# EAGLE board hat v1 (EAGLE 9.6.1)
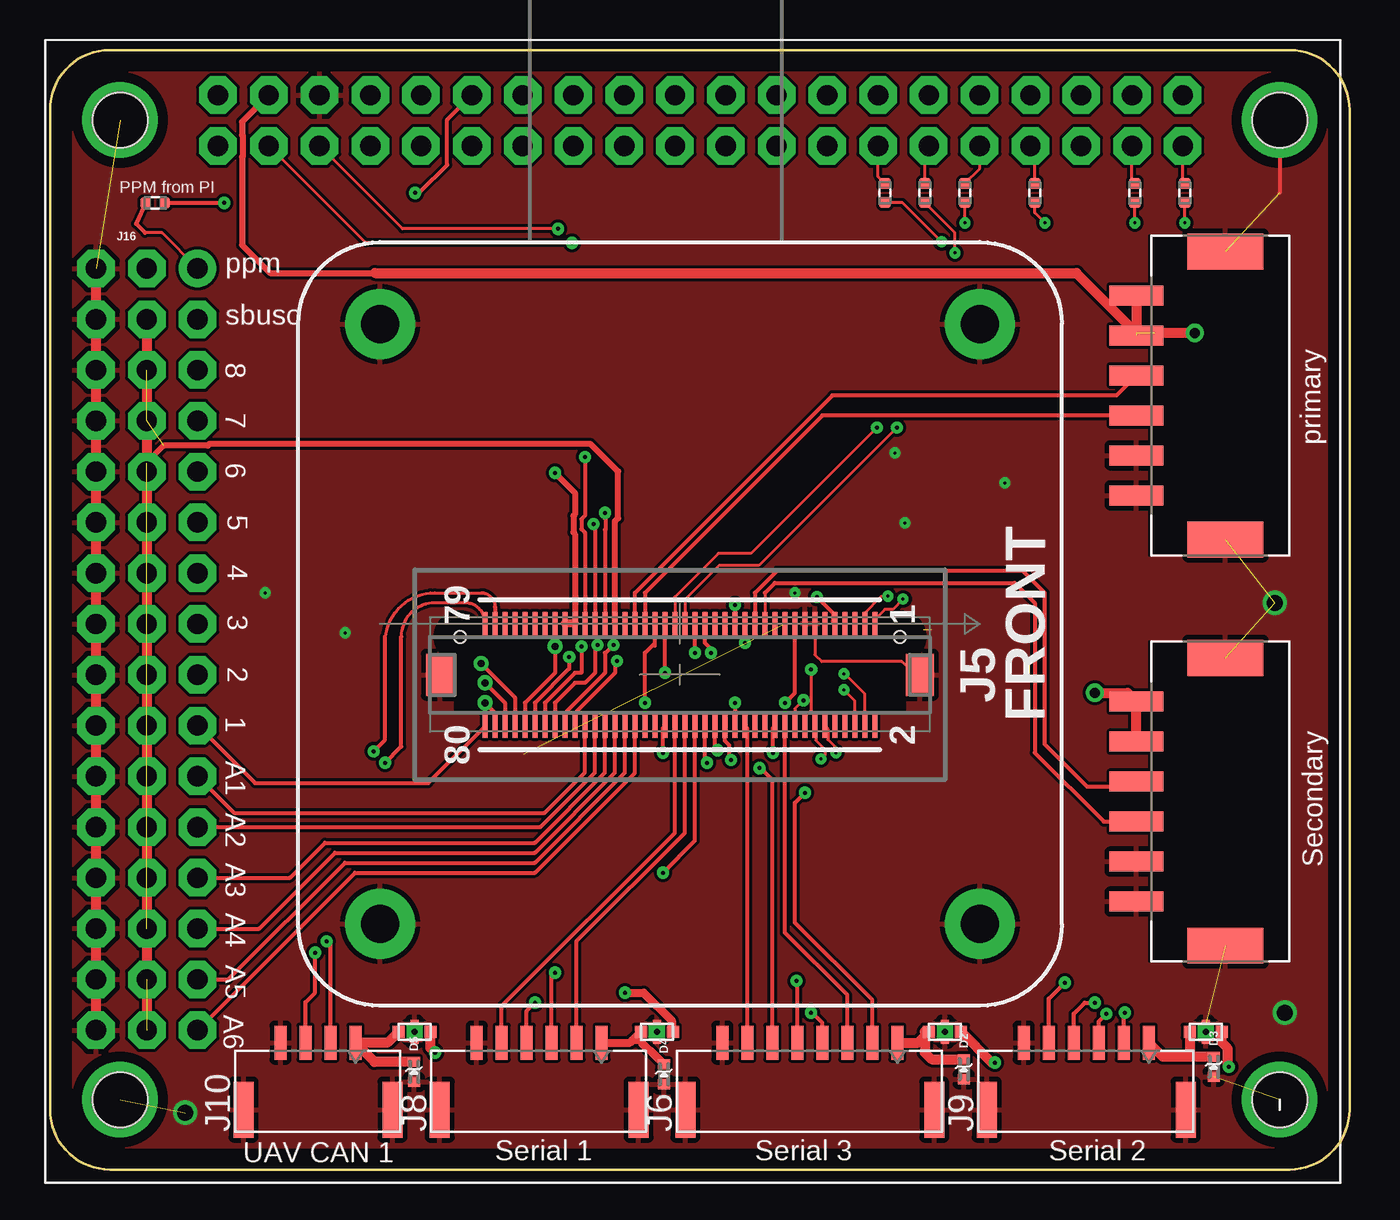
[diagram p0: board, top side]
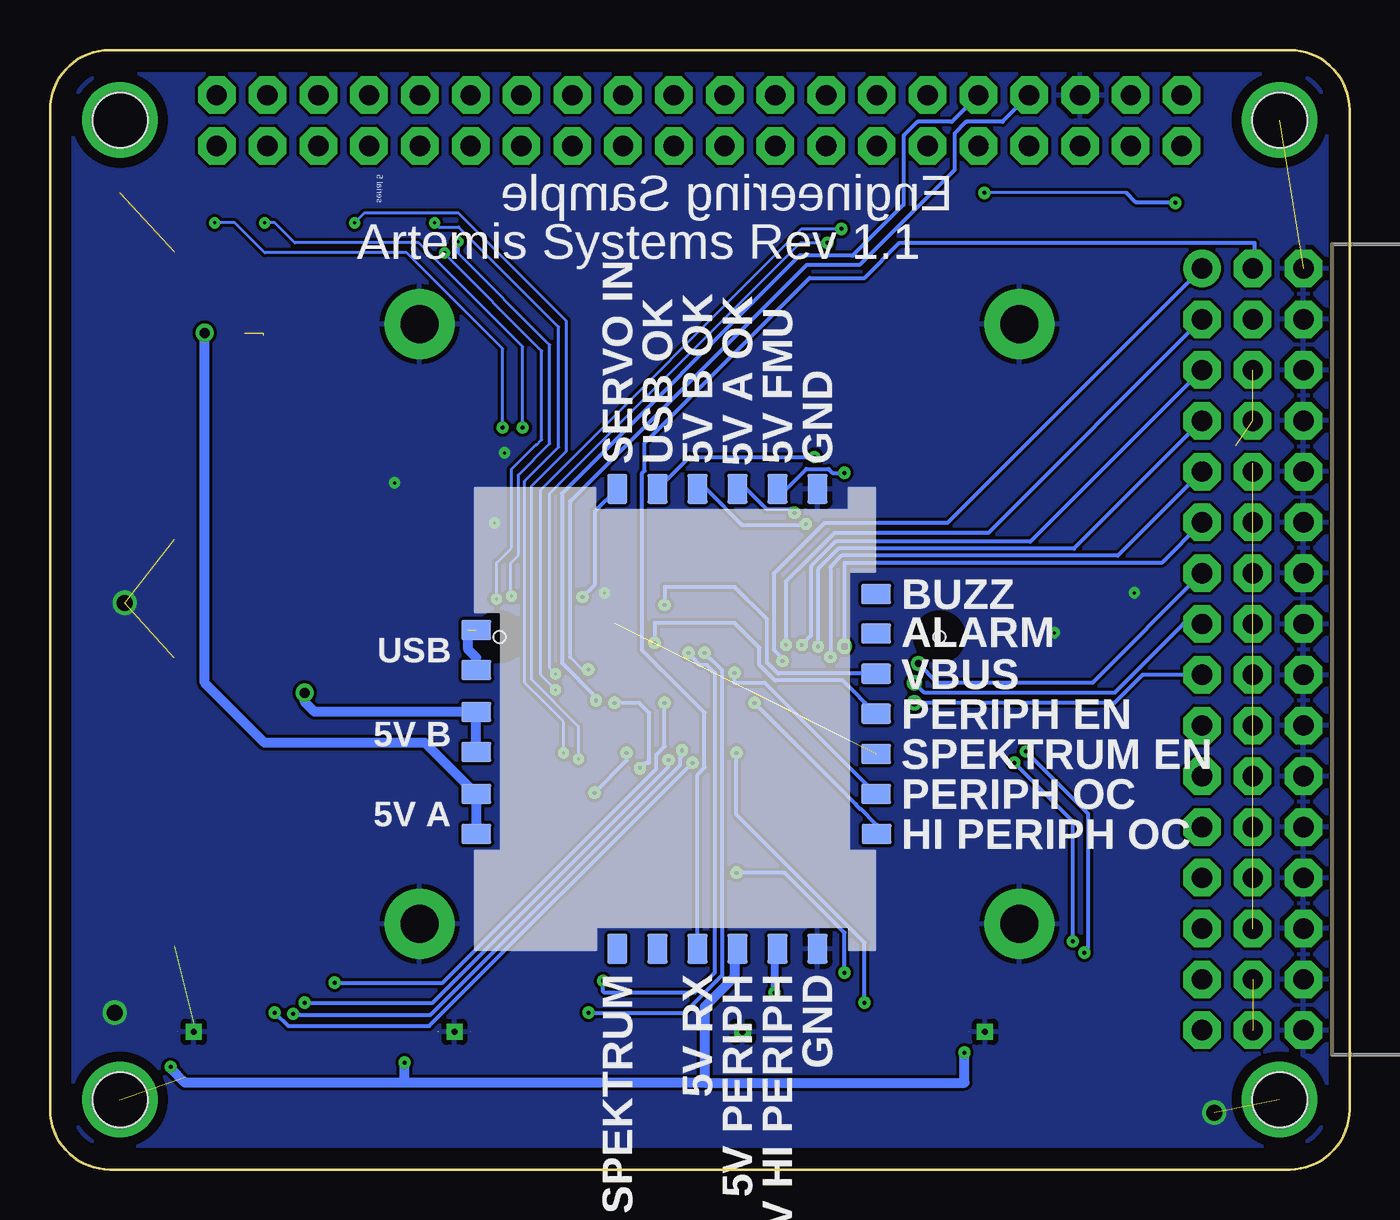
[diagram p1: board, bottom side, seen from below]

Size 65 x 56 mm. Coordinates in mm from the lower left corner, seen from the top.
Copper layers (1*16): Top 0.035mm / dielectric 1.5mm / Bottom 0.035mm
Design rules "default *": minimum track width 6mil, minimum drill 0.15mm, track to track 6mil, track to pad 6mil, pad to pad 6mil, via to via 0.2mm, smd to smd 0.2mm, copper to edge 40mil, drill to drill 6mil, minimum pad ring 10mil, minimum via ring 8mil, stop-mask expansion 4mil, vias tented up to drill 0mil, thermal gap 10mil

## Footprints (pad centres in the part's own frame; a part is rotated, then mirrored left to right if it is on the bottom)
CAP_0402 = smd 0.55 x 0.58: 1 -0.475,0; 2 0.475,0
KYOCERA-KNH16-DA = smd 0.6 x 0.6: P$1 -0.8,0; P$2 0.8,0 | smd 0.4 x 0.4: P$3 0,-0.4; P$4 0,0.4 | drill 0.3 pad 0.4 square: P$5 0,0
0402-TVS = smd 0.5 x 0.6: A 0.5,0; C -0.5,0
DF17(1.0H)-80DP-0.5V(57) = smd 0.25 x 1.15: 1 -9.75,-2.575; 2 -9.75,2.575; 3 -9.25,-2.575; 4 -9.25,2.575; 5 -8.75,-2.575; 6 -8.75,2.575; 7 -8.25,-2.575; 8 -8.25,2.575; 9 -7.75,-2.575; 10 -7.75,2.575; 11 -7.25,-2.575; 12 -7.25,2.575; 13 -6.75,-2.575; 14 -6.75,2.575; 15 -6.25,-2.575; 16 -6.25,2.575; 17 -5.75,-2.575; 18 -5.75,2.575; 19 -5.25,-2.575; 20 -5.25,2.575; 21 -4.75,-2.575; 22 -4.75,2.575; 23 -4.25,-2.575; 24 -4.25,2.575; 25 -3.75,-2.575; 26 -3.75,2.575; 27 -3.25,-2.575; 28 -3.25,2.575; 29 -2.75,-2.575; 30 -2.75,2.575; 31 -2.25,-2.575; 32 -2.25,2.575; 33 -1.75,-2.575; 34 -1.75,2.575; 35 -1.25,-2.575; 36 -1.25,2.575; 37 -0.75,-2.575; 38 -0.75,2.575; 39 -0.25,-2.575; 40 -0.25,2.575; 41 0.25,-2.575; 42 0.25,2.575; 43 0.75,-2.575; 44 0.75,2.575; 45 1.25,-2.575; 46 1.25,2.575; 47 1.75,-2.575; 48 1.75,2.575; 49 2.25,-2.575; 50 2.25,2.575; 51 2.75,-2.575; 52 2.75,2.575; 53 3.25,-2.575; 54 3.25,2.575; 55 3.75,-2.575; 56 3.75,2.575; 57 4.25,-2.575; 58 4.25,2.575; 59 4.75,-2.575; 60 4.75,2.575; 61 5.25,-2.575; 62 5.25,2.575; 63 5.75,-2.575; 64 5.75,2.575; 65 6.25,-2.575; 66 6.25,2.575; 67 6.75,-2.575; 68 6.75,2.575; 69 7.25,-2.575; 70 7.25,2.575; 71 7.75,-2.575; 72 7.75,2.575; 73 8.25,-2.575; 74 8.25,2.575; 75 8.75,-2.575; 76 8.75,2.575; 77 9.25,-2.575; 78 9.25,2.575; 79 9.75,-2.575; 80 9.75,2.575 | smd 1.4 x 2.1: M1 -12,0; M2 12,0 | hole 0.6: 11,-1.9; -11,-1.9
BM08B-GHS-TBT = smd 0.6 x 1.7: 1 4.375,4.45; 2 3.125,4.45; 3 1.875,4.45; 4 0.625,4.45; 5 -0.625,4.45; 6 -1.875,4.45; 7 -3.125,4.45; 8 -4.375,4.45 | smd 1 x 2.8: PAD1 6.225,1.1; PAD2 -6.225,1.1
BM06B-GHS-TBT = smd 0.6 x 1.7: 1 3.125,4.45; 2 1.875,4.45; 3 0.625,4.45; 4 -0.625,4.45; 5 -1.875,4.45; 6 -3.125,4.45 | smd 1 x 2.8: PAD1 4.975,1.1; PAD2 -4.975,1.1
BM04B-GHS-TBT = smd 0.6 x 1.7: 1 1.875,4.45; 2 0.625,4.45; 3 -0.625,4.45; 4 -1.875,4.45 | smd 1 x 2.8: PAD1 3.725,1.1; PAD2 -3.725,1.1
502443-0670 = smd 1 x 2.7: 1 5,3.84; 2 3,3.84; 3 1,3.84; 4 -1,3.84; 5 -3,3.84; 6 -5,3.84 | smd 1.8 x 3.8: PAD1 7.2,-0.61; PAD2 -7.2,-0.61
3X16RA = drill 1.016 pad 1.88: 1 2.54,19.05 | drill 1.016 pad 1.88 octagon: 2 0,19.05; 3 -2.54,19.05; 4 2.54,16.51; 5 0,16.51; 6 -2.54,16.51; 7 2.54,13.97; 8 0,13.97; 9 -2.54,13.97; 10 2.54,11.43; 11 0,11.43; 12 -2.54,11.43; 13 2.54,8.89; 14 0,8.89; 15 -2.54,8.89; 16 2.54,6.35; 17 0,6.35; 18 -2.54,6.35; 19 2.54,3.81; 20 0,3.81; 21 -2.54,3.81; 22 2.54,1.27; 23 0,1.27; 24 -2.54,1.27; 25 2.54,-1.27; 26 0,-1.27; 27 -2.54,-1.27; 28 2.54,-3.81; 29 0,-3.81; 30 -2.54,-3.81; 31 2.54,-6.35; 32 0,-6.35; 33 -2.54,-6.35; 34 2.54,-8.89; 35 0,-8.89; 36 -2.54,-8.89; 37 2.54,-11.43; 38 0,-11.43; 39 -2.54,-11.43; 40 2.54,-13.97; 41 0,-13.97; 42 -2.54,-13.97; 43 2.54,-16.51; 44 0,-16.51; 45 -2.54,-16.51; 46 2.54,-19.05; 47 0,-19.05; 48 -2.54,-19.05
CUBE = drill 1.9 pad 3.5: M1 -15,-15; M2 15,-15; M3 15,15; M4 -15,15
PSM = smd 1.016 x 1.5: 1 -5.5,-10.27; 2 -3.5,-10.25; 3 -1.5,-10.25; 4 0.508,-10.25; 5 2.515,-10.25; 6 4.521,-10.25; 7 6.502,-10.25; 14 4.7,9.75; 15 2.7,9.75; 16 0.6,9.75; 17 -1.4,9.75; 18 -3.5,9.75; 19 -5.5,9.75 | smd 1.5 x 1.016: 8 11.75,-7.318; 9 11.75,-5.318; 10 11.75,-3.317; 11 11.75,-1.318; 12 11.75,0.686; 13 11.75,2.692; 20 -11.25,2.692; 21 -11.25,0.686; 22 -11.25,-1.318; 23 -11.25,-3.317; 24 -11.25,-5.318; 25 -11.25,-7.318
RPI = drill 1.016 pad 1.88 octagon: 5V -67.56,60.74; CAN_H -24.38,58.2; CAN_L -21.84,58.2; FMU_FWD -34.54,58.2; FMU_SWC -37.08,58.2; GND -65.02,60.74; HEADER3 -70.1,58.2; HEADER6 -62.48,58.2; HEADER7 -59.94,58.2; HEADER8 -57.4,58.2; HEADER9 -54.86,58.2; HEADER10 -52.32,58.2; HEADER11 -49.78,58.2; HEADER12 -47.24,58.2; HEADER13 -44.7,58.2; HEADER14 -42.16,58.2; HEADER15 -39.62,58.2; HEADER23 -70.1,60.74; HEADER30 -54.86,60.74; HEADER31 -52.32,60.74; HEADER32 -49.78,60.74; HEADER33 -47.24,60.74; HEADER34 -44.7,60.74; HEADER35 -42.16,60.74; HEADER36 -39.62,60.74; HEADER37 -37.08,60.74; HEADER38 -34.54,60.74; HEADER39 -32,60.74; HEADER40 -29.46,60.74; HEADER41 -26.92,60.74; HEADER42 -24.38,60.74; HEADER43 -21.84,60.74; PWM -57.4,60.74; SDA_I2C -67.56,58.2; SER5_RX -32,58.2; SER5_TX -29.46,58.2; SLC_I2C -65.02,58.2; SPKT -26.92,58.2; UART_RX -59.94,60.74; UART_TX -62.48,60.74 | drill 2.75: GND1 -75,59.5; GND2 -75,10.5; GND3 -17,10.5; GND4 -17,59.5 | hole 2.75: -75,10.5; -17,10.5; -75,59.5; -75,59.5; -17,59.5

## Placement (x,y rotation side)
C1  CC0402CRNPO9BN1R0  [CAP_0402]  41.76,48.85 270 top
C2  CC0402CRNPO9BN1R0  [CAP_0402]  43.76,48.85 270 top
C3  CC0402CRNPO9BN1R0  [CAP_0402]  45.76,48.85 270 top
C4  CC0402CRNPO9BN1R0  [CAP_0402]  49.26,48.85 270 top
C5  NFM18PC104R1C3D  [KYOCERA-KNH16-DA]  18.23,6.89 180 top
C6  NFM18PC104R1C3D  [KYOCERA-KNH16-DA]  44.77,6.89 180 top
C7  NFM18PC104R1C3D  [KYOCERA-KNH16-DA]  57.81,6.89 180 top
C8  NFM18PC104R1C3D  [KYOCERA-KNH16-DA]  30.35,6.89 180 top
C10  CC0402CRNPO9BN1R0  [CAP_0402]  56.76,48.85 270 top
C11  CC0402CRNPO9BN1R0  [CAP_0402]  54.26,48.85 270 top
D2  PESD0402-140  [0402-TVS]  45.71,5.02 270 top
D3  PESD0402-140  [0402-TVS]  58.21,5.14 270 top
D4  PESD0402-140  [0402-TVS]  30.71,4.76 270 top
D5  PESD0402-140  [0402-TVS]  18.21,4.88 270 top
J5  DF17(1.0H)-80DP-0.5V(57)  [DF17(1.0H)-80DP-0.5V(57)]  31.51,24.75 180 top
J6  BM08B-GHS-TBT  [BM08B-GHS-TBT]  38,1.89 0 top
J8  BM06B-GHS-TBT  [BM06B-GHS-TBT]  24.47,1.89 0 top
J9  BM06B-GHS-TBT  [BM06B-GHS-TBT]  51.83,1.89 0 top
J10  BM04B-GHS-TBT  [BM04B-GHS-TBT]  13.4,1.89 0 top
J14  502443-0670  [502443-0670]  58.18,38.72 90 top
J15  502443-0670  [502443-0670]  58.18,18.4 90 top
J16  HEADER-3X163X16RA  [3X16RA]  4.84,26.02 0 top
M1  CUBE_BLACK  [CUBE]  31.51,27.29 180 top
R1  CC0402JRNPO9BN220  [CAP_0402]  5.26,48.35 0 top
U1  PSM  [PSM]  33.93,22.29 90 bottom
U$1  RPI  [RPI]  78.5,-7 0 top

## Library data of the parts
C1-C4 C10 C11 = Resistor_Capacitor; CREATED_BY: PCBLayout.com; DIGIKEY_PART_NUMBER: 311-2076-2-ND; MANUFACTURER: Yageo; MPN: CC0402CRNPO9BN1R0; PACKAGE: SMD 0402
C5-C8 = CubePilotSupport; PARTNO: NFM18PC104R1C3D
D2-D5 = CubePilotSupport; PARTNO: PESD0402-140
J5 = CubePilotSupport; PARTNO: DF17(1.0H)-80DP-0.5V(57)
J6 = CubePilotSupport; COLOR: NATURAL/IVORY; PARTNO: BM08B-GHS-TBT; STOCK: Y
J8 J9 = CubePilotSupport; COLOR: NATURAL/IVORY; PARTNO: BM06B-GHS-TBT(LF)(SN); STOCK: Y
J10 = CubePilotSupport; PARTNO: BM04B-GHS-TBT(LF)(SN); STOCK: Y
J14 J15 = CubePilotSupport; PARTNO: 502443-0670
J16 U1 = CubePilotSupport
M1 = CubePilotSupport; COLOR: BLACK; COUNTRY_OF_ORIGIN: TAIWAN
R1 = Resistor_Capacitor; CREATED_BY: PCBLayout.com; DIGIKEY_PART_NUMBER: 311-1018-2-ND; MANUFACTURER: Yageo; MPN: CC0402JRNPO9BN220; PACKAGE: SMD 0402
U$1 = telem_board

## Nets
5V_A_VALID: J5.55 U1.10
5V_B_VALID: J5.57 U1.11
5V_HI_POWER_PERIPH_OC: J5.45 U1.1
5V_PERIPH_EN: J5.27 U1.4
5V_PERIPH_OC: J5.43 U1.2
!FMU_LED_AMBER: J5.2
!IO_LED: J5.28 J6.7
+3V3_SPEKTRUM: U1.20
+5V_BACKUP: J15.1 J15.2 U1.16 U1.17
+5V_PRIMARY: J14.1 J14.2 U1.18 U1.19 U$1.5V
AUX_BATTERY_CURRENT_SENSE: J5.25 J15.3
AUX_BATTERY_VOLTAGE_SENSE: J5.23 J15.4
BATT_CURRENT_SENSE: J5.49 J14.3
BATT_VOLTAGE_SENSE: J5.47 J14.4
BUZZER: U1.7
CAN1_H: J5.79 J10.2
CAN1_L: J5.77 J10.3
CAN2_H: C11.2 J5.41
CAN2_L: C10.2 J5.39
FMU_5V_PROT: J5.61 J5.63 U1.9
FMU_CH1: J5.50 J16.46
FMU_CH2: J5.52 J16.43
FMU_CH3: J5.54 J16.40
FMU_CH4: J5.56 J16.37
FMU_CH5: J5.58 J16.34
FMU_CH6: J5.60 J16.31
FMU_SWCLK: C1.2 J5.3
FMU_SWDIO: C2.2 J5.1
FMU_VUBS: J5.29 U1.5
GND: C5.P$3 C5.P$4 C5.P$5 C6.P$3 C6.P$4 C6.P$5 C7.P$3 C7.P$4 C7.P$5 C8.P$3 C8.P$4 C8.P$5 D2.A D3.A D4.A D5.A J5.13 J5.15 J5.M1 J5.M2 J6.8 J6.PAD1 J6.PAD2 J8.6 J8.PAD1 J8.PAD2 J9.6 J9.PAD1 J9.PAD2 J10.4 J10.PAD1 J10.PAD2 J14.5 J14.6 J14.PAD1 J14.PAD2 J15.5 J15.6 J15.PAD1 J15.PAD2 J16.3 J16.6 J16.9 J16.12 J16.15 J16.18 J16.21 J16.24 J16.27 J16.30 J16.33 J16.36 J16.39 J16.42 J16.45 J16.48 M1.M1 M1.M2 M1.M3 M1.M4 U1.8 U1.25 U$1.GND U$1.GND1 U$1.GND2 U$1.GND3 U$1.GND4
I2C1_SCL: J5.37 J6.4
I2C1_SDA: J5.35 J6.5
I2C2_SCL: J5.6 U$1.SLC_I2C
I2C2_SDA: J5.4 U$1.SDA_I2C
IO-USART_RX/SPEKTRUM_RX: J5.48
IO-USART_TX: J5.46
IO_SWCLK: J5.71
IO_SWDIO: J5.69
MOTOR1: J5.80 J16.28
MOTOR2: J5.78 J16.25
MOTOR3: J5.76 J16.22
MOTOR4: J5.74 J16.19
MOTOR5: J5.72 J16.16
MOTOR6: J5.70 J16.13
MOTOR7: J5.68 J16.10
MOTOR8: J5.66 J16.7
N$1: C1.1 U$1.FMU_SWC
N$2: C6.P$2 D2.C J6.1
N$3: C7.P$2 D3.C J9.1
N$4: C8.P$2 D4.C J8.1
N$5: C5.P$2 D5.C J10.1
N$6: C2.1 U$1.FMU_FWD
N$7: C3.1 U$1.SER5_RX
N$8: R1.2 U$1.PWM
N$9: C4.1 U$1.SER5_TX
N$11: C10.1 U$1.CAN_L
N$12: C11.1 U$1.CAN_H
OTG1_D_N: J5.33
OTG1_D_P: J5.31
PPM_IN/SBUS_IN: J5.62 J16.1 R1.1
PRESSURE_SENSE: J5.21
SAFETY_BUTTON: J5.17 J6.6
SBUS_OUT: J5.64 J16.4
SERIAL1_CTS: J5.44 J8.4
SERIAL1_RTS: J5.42 J8.5
SERIAL1_RX: J5.38 J8.3
SERIAL1_TX: J5.40 J8.2
SERIAL2_CTS: J5.32 J9.4
SERIAL2_RTS: J5.30 J9.5
SERIAL2_RX: J5.34 J9.3
SERIAL2_TX: J5.36 J9.2
SERIAL3_RX: J5.20 J6.3
SERIAL3_TX: J5.22 J6.2
SERIAL4_RX: J5.18 U$1.UART_RX
SERIAL4_TX: J5.16 U$1.UART_TX
SERIAL5_RX: C3.2 J5.12
SERIAL5_TX: C4.2 J5.14
SERVO_IN: J5.9 U1.13
SPEKTRUM_EN: J5.19 U1.3
USB_VBUS_VALID: J5.59 U1.12
VBUS: U1.14 U1.15
VCCIO: J16.2 U1.22
VDD_HI_PWR_PERIPH: C8.P$1 U1.24
VDD_PERIPH: C5.P$1 C6.P$1 C7.P$1 U1.23
VSERVO: J5.53 J16.5 J16.8 J16.11 J16.14 J16.17 J16.20 J16.23 J16.26 J16.29 J16.32 J16.35 J16.38 J16.41 J16.44 J16.47

## Tracks (layer width: path | path; a pad name or v marks a point on that pad's centre or on a via)
5V_A_VALID  (via drill 0.2)
  Top 0.2: v27.76,32.85 27.76,32.56 27.79,32.53 27.79,32.03 27.76,32 J5.55
  Bottom 0.2: U1.10 30.17,34.04 29.17,33.04 27.95,33.04 v27.76,32.85
5V_B_VALID  (via drill 0.2)
  Top 0.2: v27.19,32.28 27.26,32.21 J5.57
  Bottom 0.2: U1.11 32.17,34.04 30.38,32.25 27.51,32.25 27.48,32.28 v27.19,32.28
5V_HI_POWER_PERIPH_OC  (via drill 0.2)
  Top 0.2: 30.26,26.21 30.26,26.35 | 30.26,26.35 J5.45 | 30.26,26.35 29.76,25.85 v29.76,23.35
  Bottom 0.2: U1.1 23.66,17.25 24.44,18.03 24.48,18.03 24.68,18.24 24.68,18.27 v29.76,23.35
5V_PERIPH_EN  (via drill 0.2)
  Top 0.2: v34.76,26.35 J5.27
  Bottom 0.2: 24.23,23.35 U1.4 25.34,24.45 28.73,24.45 29.5,25.23 29.5,26.09 30.76,27.35 34.76,27.35 v34.76,26.35
5V_PERIPH_OC  (via drill 0.2)
  Top 0.2: J5.43 30.76,25.85 30.76,25.45 v30.76,24.85
  Bottom 0.2: U1.2 29.24,24.35 30.76,24.35 v30.76,24.85
!IO_LED
  Top 0.2: J6.7 34.88,22.06 J5.28
+5V_BACKUP  (via drill 0.5)
  Top 0.5: v52.26,23.85 53.89,23.85 J15.1 J15.2
  Bottom 0.5: v52.26,23.85 52.26,23.39 51.76,22.89 U1.16 U1.17
+5V_PRIMARY  (via drill 0.5)  (2 unrouted)
  Top 0.305: U$1.5V 9.61,52.41 9.61,51.75 9.65,51.72 9.65,50.68 9.61,50.65 9.61,46.25 11.01,44.85 16.26,44.85
  Top 0.5: J14.1 54.34,41.85 51.34,44.85 16.26,44.85 | v57.26,41.85 55.26,41.85
  Bottom 0.5: U1.19 U1.18 46.24,21.35 54.26,21.35 57.26,24.35 v57.26,41.85
AUX_BATTERY_CURRENT_SENSE
  Top 0.2: J15.3 54.09,19.15 51.89,19.15 49.76,21.27 49.76,28.85 48.66,29.95 36.36,29.95 35.26,28.85 J5.25
AUX_BATTERY_VOLTAGE_SENSE
  Top 0.152: 35.76,28.85 J5.23
  Top 0.2: 35.76,28.85 36.26,29.35 48.26,29.35 49.26,28.35 49.26,20.85 52.71,17.4 J15.4
BATT_CURRENT_SENSE
  Top 0.2: J5.49 29.26,28.85 39.13,38.72 53.34,38.72 J14.3
BATT_VOLTAGE_SENSE
  Top 0.2: J5.47 29.76,28.85 38.63,37.72 J14.4
CAN1_H  (via drill 0.2)
  Top 0.152: J5.79 21.76,27.35 arc90 20.76,28.35 19.26,28.35 arc90 17.57,26.66
  Top 0.2: J10.2 14.03,11.22 v13.83,11.42 | v16.76,20.35 17.57,21.16 17.57,26.66
  Bottom 0.2: v13.83,11.42 13.83,17.42 v16.76,20.35
CAN1_L  (via drill 0.2)
  Top 0.152: 16.76,26.35 arc-90 19.26,28.85 21.57,28.85 arc-90 22.26,28.16
  Top 0.2: 12.76,6.35 J10.3 12.78,8.37 13.26,8.85 v13.26,10.85 | v16.19,20.92 16.76,21.49 16.76,26.35 16.76,26.66 | 22.26,28.16 J5.77
  Bottom 0.2: v13.26,10.85 13.26,10.91 13.07,11.1 13.07,17.8 v16.19,20.92
CAN2_H  (via drill 0.15, 0.2)
  Top 0.152: v41.35,37.12 35.05,30.82 33.43,30.82 31.26,28.65 J5.41 | v54.26,47.35 C11.2
  Bottom 0.152: v41.35,37.12 41.35,41.15 46.55,46.35 52.76,46.35 53.76,47.35 v54.26,47.35
CAN2_L  (via drill 0.15, 0.2)
  Top 0.152: v42.36,37.12 35.46,30.22 33.47,30.22 31.76,28.5 J5.39 | v56.76,47.35 C10.2
  Bottom 0.152: v42.36,37.12 42.36,41.05 47.16,45.85 54.26,45.85 55.76,47.35 v56.76,47.35
FMU_5V_PROT  (via drill 0.2)
  Top 0.3: v25.26,34.85 26.26,33.85 26.26,32.77 26.18,32.7 26.18,31.86 26.26,31.79 J5.61
  Top 0.4: J5.61 J5.63
  Bottom 0.2: U1.9 28.17,34.04 27.17,35.04 26.06,35.04 25.87,34.85 v25.26,34.85
FMU_CH1
  Top 0.203: J16.46 15.26,14.85 24.26,14.85 29.26,19.85 J5.50
FMU_CH2
  Top 0.203: J5.52 28.76,19.85 24.26,15.35 14.76,15.35 8.92,9.51 J16.43
FMU_CH3
  Top 0.203: J5.54 28.26,19.86 24.25,15.85 14.26,15.85 10.46,12.05 J16.40
FMU_CH4
  Top 0.203: J5.56 27.76,19.86 24.25,16.35 13.76,16.35 12,14.59 J16.37
FMU_CH5
  Top 0.203: J5.58 27.26,19.86 24.53,17.13 J16.34
FMU_CH6
  Top 0.203: J16.31 9.2,17.85 24.75,17.85 26.76,19.87 J5.60
FMU_SWCLK  (via drill 0.15)
  Top 0.152: J5.3 40.76,27.85 41.59,28.68 v41.91,28.68 | v44.6,46.4 42.63,48.38 C1.2
  Bottom 0.152: 41.86,28.73 v41.91,28.68 41.96,28.72 41.96,30.35 41.57,30.74 41.57,34.75 40.01,36.3 40.01,41.25 44.6,45.84 v44.6,46.4
FMU_SWDIO  (via drill 0.15)
  Top 0.152: J5.1 41.26,27.52 41.76,28.02 42.15,28.02 v42.67,28.54 | C2.2 45.26,46.88 v45.26,45.85
  Bottom 0.152: v42.67,28.54 42.67,30.34 41.92,31.1 41.92,35.04 40.7,36.25 40.66,36.25 40.41,36.5 40.41,40.95 45.26,45.8 v45.26,45.85
FMU_VUBS  (via drill 0.2)
  Top 0.2: v34.26,28.24 J5.29
  Bottom 0.2: U1.5 28.58,24.8 29.15,25.37 29.15,27.54 30.76,29.15 34.26,29.15 v34.26,28.24
GND  (via drill 0.15, 0.8)  (7 unrouted)
  Top 0.152: J5.13 38.26,25.75 38.61,25.4 42.61,25.4 43.26,24.75 J5.M1
  Top 0.2: U$1.GND4 61.5,48.85
  Top 0.5: J16.48 J16.3
  other vias: 61.76,7.85 61.26,28.35 6.76,2.85 37.26,28.85 42.26,35.85 47.76,34.35 42.76,32.35 10.76,28.85 14.76,26.85
  pour Top: 0.26,55.85 64.76,55.85 64.76,-1.15 0.26,-1.15 -0.24,-0.65
  pour Bottom: 0.76,54.85 0.76,0.85 65.26,0.85 65.76,1.35 65.76,54.35 64.26,55.85 1.76,55.85
I2C1_SCL  (via drill 0.2)
  Top 0.2: J6.4 38.63,7.34 38.07,7.9 v38.07,7.85 | v32.26,25.85 J5.37
  Bottom 0.2: v38.07,7.85 33.26,7.85 31.37,9.74 31.37,24.96 v32.26,25.85
I2C1_SDA  (via drill 0.2)
  Top 0.2: v37.34,9.43 37.38,9.39 J6.5 | v33.07,25.85 33.07,26.04 32.76,26.35 J5.35
  Bottom 0.2: v33.07,25.85 32.86,25.65 32.86,25.6 32.51,25.25 32.16,25.25 31.76,24.85 31.76,9.85 32.76,8.85 37.26,8.85 37.34,8.93 v37.34,9.43
I2C2_SCL  (via drill 0.15, 0.2)
  Top 0.152: J5.6 40.26,23.45 v39.71,24 | v25.41,47.05 17.63,47.05 U$1.SLC_I2C
  Bottom 0.152: v39.71,24 40.46,24.75 40.46,34 27.41,47.05 v25.41,47.05
I2C2_SDA  (via drill 0.15, 0.2)
  Top 0.152: v39.71,24.8 39.76,24.8 40.76,23.8 J5.4 | v26.11,46.35 15.79,46.35 U$1.SDA_I2C
  Bottom 0.152: 39.76,24.8 v39.71,24.8 40.01,25.1 40.01,33.8 27.46,46.35 v26.11,46.35
MOTOR1
  Top 0.203: J16.28 10.26,19.33 18.92,19.33 J5.80
MOTOR2  (via drill 0.35)
  Top 0.2: v21.76,23.35 22.26,22.85 J5.78
  Bottom 0.2: J16.25 10.36,24.75 11.76,23.35 v21.76,23.35
MOTOR3  (via drill 0.35)
  Top 0.2: v21.76,24.35 22.76,23.35 J5.76
  Bottom 0.2: v21.76,24.35 21.26,23.85 11.76,23.85 8.32,27.29 J16.22
MOTOR4  (via drill 0.35)
  Top 0.2: v21.56,25.31 23.26,23.61 J5.74
  Bottom 0.2: J16.19 12.86,24.35 20.61,24.35 v21.56,25.31
MOTOR5  (via drill 0.35)
  Top 0.2: v25.26,26.17 25.26,24.85 23.76,23.35 J5.72
  Bottom 0.2: J16.16 9.4,30.35 25.26,30.35 v25.26,26.17
MOTOR6  (via drill 0.2)
  Top 0.2: v25.97,25.64 25.97,25.06 24.26,23.35 J5.70
  Bottom 0.2: J16.13 11.59,30.7 25.41,30.7 25.97,30.14 v25.97,25.64
MOTOR7  (via drill 0.2)
  Top 0.2: v26.58,26.17 26.58,24.85 26.26,24.85 24.76,23.35 J5.68
  Bottom 0.2: J16.10 13.78,31.05 25.55,31.05 26.58,30.03 v26.58,26.17
MOTOR8  (via drill 0.2)
  Top 0.2: v27.39,26.25 27.26,26.12 27.26,24.85 26.76,24.35 26.26,24.35 25.26,23.35 J5.66
  Bottom 0.2: v27.39,26.25 26.93,26.7 26.93,30.18 25.7,31.41 15.96,31.41 J16.7
N$1
  Top 0.152: C1.1 41.42,49.66 U$1.FMU_SWC
N$2  (1 unrouted)
  Top 0.5: J6.1 43.42,6.34 C6.P$2 43.76,6.89 43.76,5.85 44.09,5.52 D2.C
N$3
  Top 0.5: D3.C 56.76,5.64 | 56.76,5.64 55.66,5.64 J9.1 | C7.P$2 57.01,5.89 56.76,5.64
N$4
  Top 0.4: J8.1 29,6.34 29.14,6.47 | 29.14,6.47 C8.P$2 | 29.14,6.47 29.5,6.47 29.59,6.38 29.59,6.34 30,5.94 30.03,5.94 D4.C
N$5
  Top 0.5: D5.C 16.24,5.38 J10.1 16.88,6.34 C5.P$2
N$6
  Top 0.152: C2.1 43.76,51 U$1.FMU_FWD
N$7
  Top 0.152: C3.1 46.5,50.07 U$1.SER5_RX
N$8  (via drill 0.2)
  Top 0.2: R1.2 v8.71,48.35 | U$1.PWM 19.86,52.5 19.86,50.24 18.47,48.85 v18.26,48.85
  Bottom 0.152: 11.16,48.85 v18.26,48.85
  Bottom 0.2: 11.16,48.85 10.71,48.4 8.76,48.4 v8.71,48.35
N$9
  Top 0.152: C4.1 49.26,50.98 U$1.SER5_TX
N$11
  Top 0.152: C10.1 56.66,49.43 U$1.CAN_L
N$12
  Top 0.152: C11.1 54.12,49.47 U$1.CAN_H
PPM_IN/SBUS_IN  (via drill 0.2)
  Top 0.152: J16.1 5.6,46.85 4.76,46.85
  Top 0.2: v28.36,25.44 28.26,25.34 28.26,24.85 26.26,22.85 J5.62 | R1.1 4.31,47.3 4.76,46.85
  Bottom 0.2: v28.36,25.44 28.36,25.56 28.8,26 28.8,29.81 26.26,32.35 20.1,32.35 J16.1
SAFETY_BUTTON  (via drill 0.2)
  Top 0.2: J6.6 36.13,19.48 35.53,20.08 v35.49,20.08 | v36.76,23.35 37.26,23.85 J5.17
  Bottom 0.2: v35.49,20.08 35.21,20.35 35.03,20.35 35.03,22.85 35.53,23.35 v36.76,23.35
SBUS_OUT  (via drill 0.2)
  Top 0.2: v28.19,26.25 27.8,25.85 27.76,25.85 27.76,24.85 25.76,22.85 J5.64
  Bottom 0.2: v28.19,26.25 28.19,29.42 25.76,31.85 18.06,31.85 J16.4
SERIAL1_CTS  (via drill 0.2)
  Top 0.2: J8.4 23.85,7.94 v24.26,8.35 | v30.66,20.85 30.66,22.07 J5.44
  Bottom 0.2: v24.26,8.35 24.26,11.35 30.66,17.75 v30.66,20.85
SERIAL1_RTS
  Top 0.2: J8.5 22.6,8.19 31.26,16.85 J5.42
SERIAL1_RX  (via drill 0.2)
  Top 0.2: J8.3 25.1,9.69 v25.26,9.85 | v30.66,14.85 32.26,16.45 J5.38
  Bottom 0.2: v25.26,9.85 25.26,11.85 28.26,14.85 v30.66,14.85
SERIAL1_TX
  Top 0.2: J8.2 26.35,11.44 31.76,16.85 J5.40
SERIAL2_CTS  (via drill 0.2)
  Top 0.2: J9.4 51.21,7.79 51.76,8.35 v52.26,8.35 | J5.32 33.76,21.45 33.99,21.22 33.99,20.58 v34.07,20.49
  Bottom 0.2: v52.26,8.35 45.86,8.35 34.07,20.14 v34.07,20.49
SERIAL2_RTS  (via drill 0.2)
  Top 0.2: J9.5 49.96,8.54 v50.76,9.35 | v34.26,23.35 J5.30
  Bottom 0.2: v34.26,23.35 34.26,21.16 34.67,20.74 34.67,20.04 45.36,9.35 v50.76,9.35
SERIAL2_RX  (via drill 0.2)
  Top 0.2: J9.3 52.46,7.4 v52.83,7.78 | v33.38,20.97 33.26,21.09 J5.34
  Bottom 0.2: v52.83,7.78 52.54,7.78 52.51,7.75 45.97,7.75 33.47,20.24 33.47,20.6 33.38,20.68 v33.38,20.97
SERIAL2_TX  (via drill 0.2)
  Top 0.2: J9.2 53.71,7.79 v53.76,7.85 | v32.86,20.35 32.76,20.45 J5.36
  Bottom 0.2: v53.76,7.85 v53.75,7.85 53.08,7.18 46.04,7.18 v32.86,20.35
SERIAL3_RX
  Top 0.2: J6.3 39.88,8.73 36.76,11.85 J5.20
SERIAL3_TX  (via drill 0.2)
  Top 0.2: J6.2 41.13,8.48 37.26,12.35 37.26,18.35 v37.76,18.85 | v36.16,20.85 36.16,22.07 J5.22
  Bottom 0.2: v37.76,18.85 36.16,20.45 v36.16,20.85
SERIAL4_RX  (via drill 0.2)
  Top 0.152: v37.68,23.47 37.26,23.05 J5.18
  Bottom 0.2: U$1.UART_RX 19.9,52.4 21.62,52.4 22.3,51.72 22.3,48.26 24.86,45.7 27.51,45.7 39.39,33.81 39.39,25.34 37.68,23.62 v37.68,23.47
SERIAL4_TX  (via drill 0.2)
  Top 0.152: v38.07,25.02 38.07,22.96 37.76,22.65 J5.16
  Bottom 0.152: 38.99,25.63 38.38,25.02 v38.07,25.02
  Bottom 0.2: U$1.UART_TX 17.36,52.4 19.18,52.4 19.76,51.82 19.76,50 24.51,45.25 27.16,45.25 38.99,33.42 38.99,25.63
SERIAL5_RX  (via drill 0.15)
  Top 0.152: J5.12 38.91,22.03 38.91,21.51 39.26,21.15 39.26,20.85 v39.31,20.85 | v45.76,47.35 C3.2
  Bottom 0.152: v39.31,20.85 39.31,22.4 40.31,23.4 41.26,24.35 41.26,34.43 39.56,36.13 39.56,42.15 44.56,47.15 45.56,47.15 v45.76,47.35
SERIAL5_TX  (via drill 0.15)
  Top 0.152: J5.14 38.31,22.13 38.31,21.46 38.76,21.01 38.76,20.74 v38.56,20.54 | v49.76,47.35 49.26,47.85 C4.2
  Bottom 0.152: v38.56,20.54 38.56,22.15 40.92,24.51 40.92,34.19 39.17,35.94 39.17,42.44 44.58,47.85 49.26,47.85 v49.76,47.35
SERVO_IN  (via drill 0.2)
  Top 0.2: J5.9 39.16,27.42 39.16,27.85 v38.36,28.65
  Bottom 0.2: U1.13 37.76,32.9 37.76,29.25 v38.36,28.65
SPEKTRUM_EN  (1 unrouted)
USB_VBUS_VALID  (via drill 0.2)
  Top 0.2: v26.76,35.65 26.76,32.7 26.59,32.53 26.59,32.03 26.76,31.86 J5.59
  Bottom 0.2: U1.12 33.01,35.65 v26.76,35.65
VBUS  (1 unrouted)
  Bottom 0.5: U1.15 43.68,25.6 44.08,26 44.08,26.99
VCCIO
  Bottom 0.2: U1.22 32.61,19.75 32.26,20.1 32.26,22.85 35.38,25.97 35.38,34.84 35.26,34.95 35.26,36.35 27.01,44.6 24.26,44.6 22.51,46.35 4.76,46.35 4.76,45.15 J16.2
VDD_HI_PWR_PERIPH  (via drill 0.2)
  Top 0.4: C8.P$1 31.11,6.93 31.11,7.44 29.7,8.85 v28.76,8.85
  Bottom 0.4: U1.24 28.76,10.89 v28.76,8.85
VDD_PERIPH  (via drill 0.2)  (3 unrouted)
  Top 0.5: v19.26,5.85 19.03,6.08 19.03,6.31 19.04,6.32 C5.P$1 | v47.26,5.35 47.11,5.35 C6.P$1 | v58.97,5.14 58.91,5.2 58.91,6.06 58.62,6.35 C7.P$1
  Bottom 0.5: 32.26,4.35 32.26,8.14 30.76,9.64 30.76,10.89 U1.23 | 32.26,4.35 19.26,4.35 v19.26,5.85 | 32.26,4.35 47.26,4.35 | 47.26,4.35 v47.26,5.35 | 47.26,4.35 58.26,4.35 58.97,5.06 v58.97,5.14
VSERVO  (13 unrouted)
  Top 0.3: J5.53 28.26,32.43 28.41,32.58 28.41,34.92 27.03,36.3 7.99,36.3 7.9,36.21 5.7,36.21 4.84,35.35
  Top 0.5: J16.5 4.84,35.35 J16.47

## Text on the board
tPlace: PPM from PI | ppm | sbuso | 8 | 7 | primary | 6 | 5 | 4 | 3 | 2 | 1 | A1 | A2 | A3 | Secondary | A4 | A5 | A6 | UAV CAN 1 | Serial 1 | Serial 3 | Serial 2
bPlace: Engineering Sample | serial 5 | Artemis Systems Rev 1.1
_tsilk: serial 5 | serial 5 | CAN 2 H | CAN 2 L